# EAGLE board loc_board1_r (EAGLE 9.6.2)
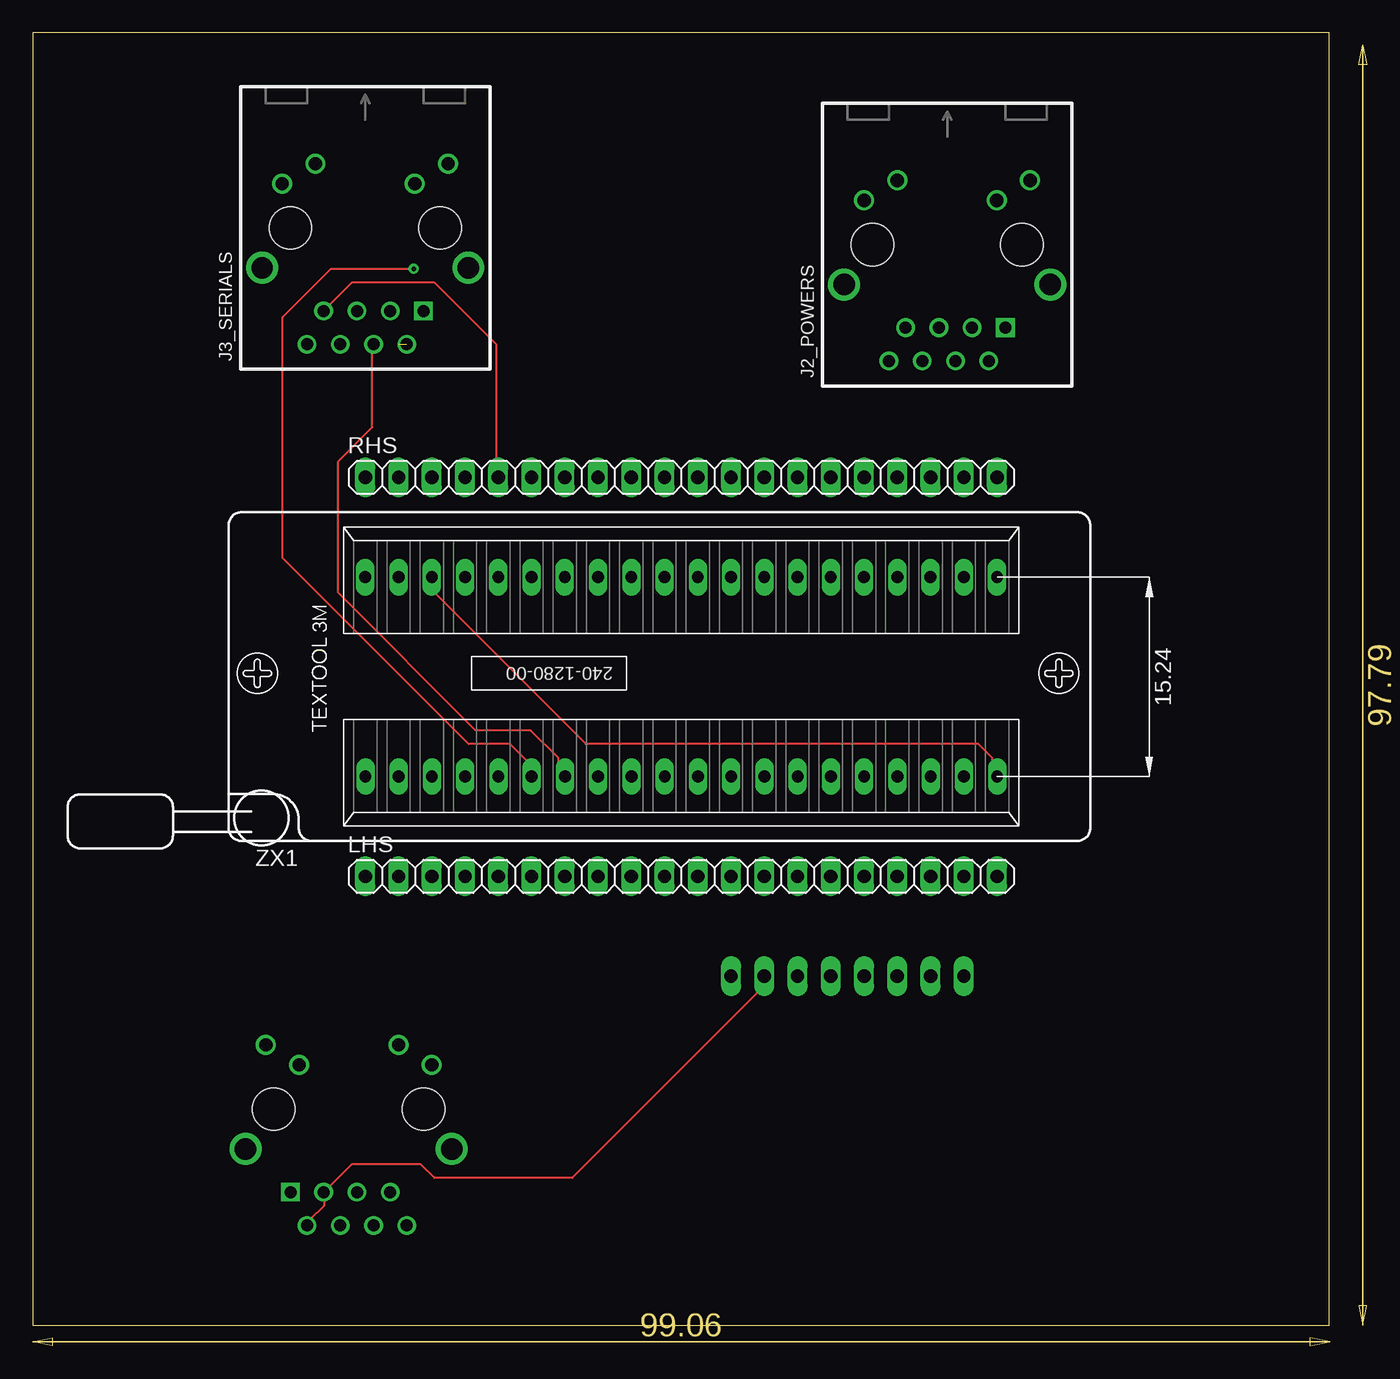
[diagram p0: board, top side]
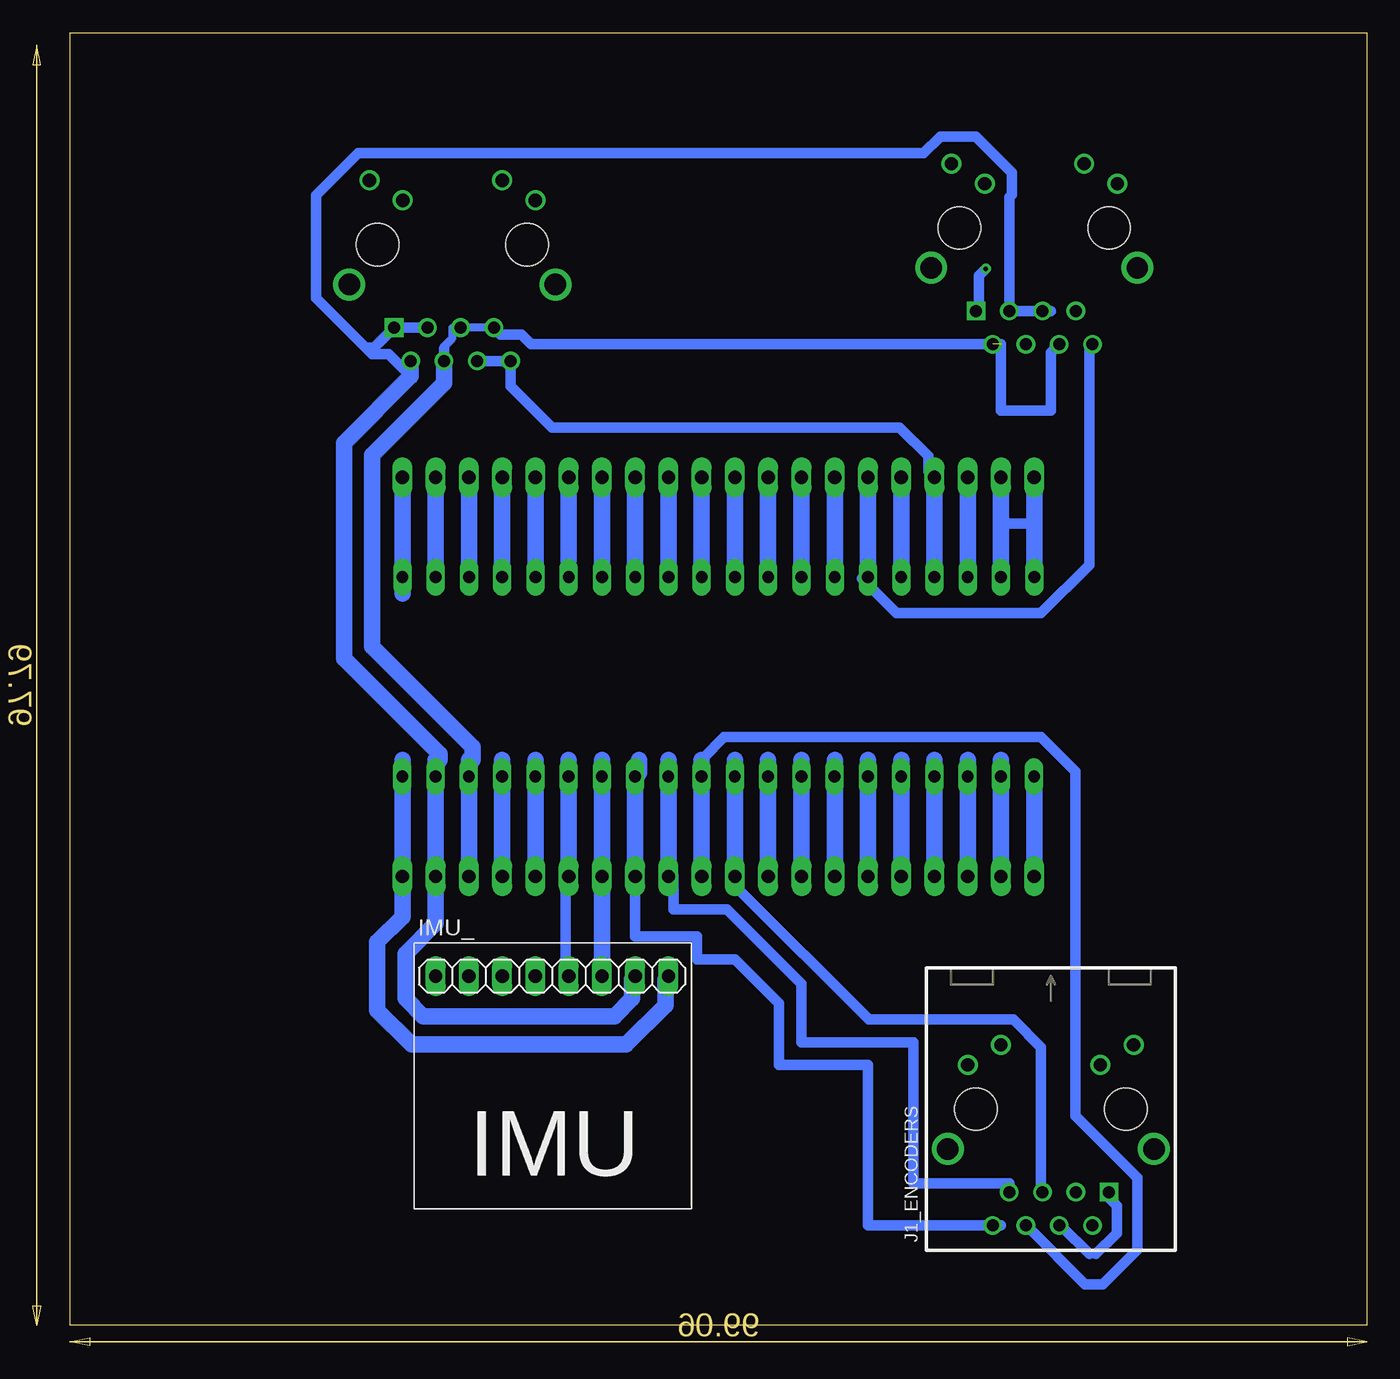
[diagram p1: board, bottom side, seen from below]

Size 99.04 x 98.73 mm. Coordinates in mm from the lower left corner, seen from the top.
Outline: 0,0 99.04,0 99.04,98.73 0,98.73 0,0
Copper layers (1*16): Top 0.035mm / dielectric 1.5mm / Bottom 0.035mm
Design rules "default *": minimum track width 6mil, minimum drill 0.35mm, track to track 0.9mm, track to pad 0.9mm, pad to pad 6mil, via to via 6mil, smd to smd 6mil, copper to edge 40mil, drill to drill 6mil, minimum pad ring 10mil, minimum via ring 8mil, stop-mask expansion 4mil, vias tented up to drill 0mil, thermal gap 10mil

## Footprints (pad centres in the part's own frame; a part is rotated, then mirrored left to right if it is on the bottom)
IMU_GY521 = drill 1.016 long: ADO -6.35,0; GND 6.35,0; INT -8.89,0; SCL 3.81,0; SDA 1.27,0; VCC 8.89,0; XCL -3.81,0; XDA -1.27,0
J0-A/B/F = drill 0.914 square: 1 4.445,-6.35 | drill 0.914: 2 3.175,-8.89; 3 1.905,-6.35; 4 0.635,-8.89; 5 -0.635,-6.35; 6 -1.905,-8.89; 7 -3.175,-6.35; 8 -4.445,-8.89 | drill 1.016: 9 6.325,4.902; 10 3.785,3.378; 11 -3.81,4.902; 12 -6.35,3.378 | drill 1.626: S1 -7.874,-3.048; S2 7.874,-3.048 | hole 3.251: -5.715,0; 5.715,0
1X20 = drill 1.016 long: 1 -24.13,0; 2 -21.59,0; 3 -19.05,0; 4 -16.51,0; 5 -13.97,0; 6 -11.43,0; 7 -8.89,0; 8 -6.35,0; 9 -3.81,0; 10 -1.27,0; 11 1.27,0; 12 3.81,0; 13 6.35,0; 14 8.89,0; 15 11.43,0; 16 13.97,0; 17 16.51,0; 18 19.05,0; 19 21.59,0; 20 24.13,0
240-1280-00-0602J = drill 0.9 long: 1 -24.12,-8.88; 2 -21.58,-8.88; 3 -19.04,-8.88; 4 -16.5,-8.88; 5 -13.96,-8.88; 6 -11.42,-8.88; 7 -8.88,-8.88; 8 -6.34,-8.88; 9 -3.8,-8.88; 10 -1.26,-8.88; 11 1.28,-8.88; 12 3.82,-8.88; 13 6.36,-8.88; 14 8.9,-8.88; 15 11.44,-8.88; 16 13.98,-8.88; 17 16.52,-8.88; 18 19.06,-8.88; 19 21.6,-8.88; 20 24.14,-8.88; 21 24.13,6.35; 22 21.59,6.35; 23 19.05,6.35; 24 16.51,6.35; 25 13.97,6.35; 26 11.43,6.35; 27 8.89,6.35; 28 6.35,6.35; 29 3.81,6.35; 30 1.27,6.35; 31 -1.27,6.35; 32 -3.81,6.35; 33 -6.35,6.35; 34 -8.89,6.35; 35 -11.43,6.35; 36 -13.97,6.35; 37 -16.51,6.35; 38 -19.05,6.35; 39 -21.59,6.35; 40 -24.13,6.35

## Placement (x,y rotation side)
IMU_  IMU_ROBOCON_GY521  [IMU_GY521]  62.23,26.67 0 bottom
J1_ENCODERS  RJ45_METAL_LEDS  [J0-A/B/F]  24.13,16.51 0 bottom
J2_POWERS  RJ45_METAL_LEDS  [J0-A/B/F]  69.85,82.55 0 top
J3_SERIALS  RJ45_METAL_LEDS  [J0-A/B/F]  25.4,83.82 0 top
LHS  [1X20]  49.53,34.29 0 top
RHS  [1X20]  49.53,64.77 0 top
ZX1  ZIF_401280  [240-1280-00-0602J]  49.53,50.8 0 top

## Library data of the parts
IMU_ J1_ENCODERS J2_POWERS J3_SERIALS LHS RHS ZX1 = MIA_LIBRARY-2-2-2

## Nets
3.3V: IMU_.VCC LHS.20 RHS.3 ZX1.20 ZX1.38
5V: J2_POWERS.4 J2_POWERS.5 J2_POWERS.7 J3_SERIALS.2 J3_SERIALS.6 LHS.18 ZX1.18
ADO: IMU_.ADO
GND: IMU_.GND J1_ENCODERS.2 J1_ENCODERS.3 J2_POWERS.1 J2_POWERS.2 J2_POWERS.3 J3_SERIALS.3 LHS.19 ZX1.19
INT: IMU_.INT
LA1: J1_ENCODERS.9
LA2: J3_SERIALS.9
LA3: J2_POWERS.9
LC1: J1_ENCODERS.10
LC2: J3_SERIALS.10
LC3: J2_POWERS.10
N$2: J1_ENCODERS.1 J1_ENCODERS.4
N$3: RHS.1 RHS.2 ZX1.39 ZX1.40
PA0: RHS.16 ZX1.25
PA1: RHS.15 ZX1.26
PA2: RHS.14 ZX1.27
PA3: RHS.13 ZX1.28
PA4: RHS.12 ZX1.29
PA5: RHS.11 ZX1.30
PA6: RHS.10 ZX1.31
PA7: RHS.9 ZX1.32
PA8: LHS.5 ZX1.5
PA9: J3_SERIALS.1 LHS.6 ZX1.6
PA10: J3_SERIALS.4 LHS.7 ZX1.7
PA11: LHS.8 ZX1.8
PA12: LHS.9 ZX1.9
PA15: J1_ENCODERS.5 LHS.10 ZX1.10
PB0: RHS.8 ZX1.33
PB1: RHS.7 ZX1.34
PB3: J1_ENCODERS.6 LHS.11 ZX1.11
PB4: J1_ENCODERS.7 LHS.12 ZX1.12
PB5: LHS.13 ZX1.13
PB6: IMU_.SCL LHS.14 ZX1.14
PB7: IMU_.SDA LHS.15 ZX1.15
PB8: LHS.16 ZX1.16
PB9: LHS.17 ZX1.17
PB10: J3_SERIALS.8 RHS.6 ZX1.35
PB11: J3_SERIALS.7 RHS.5 ZX1.36
PB12: LHS.1 ZX1.1
PB13: LHS.2 ZX1.2
PB14: LHS.3 ZX1.3
PB15: LHS.4 ZX1.4
PC13: RHS.19 ZX1.22
PC14: RHS.18 ZX1.23
PC15: RHS.17 ZX1.24
RA1: J1_ENCODERS.12
RA2: J3_SERIALS.12
RA3: J2_POWERS.12
RC1: J1_ENCODERS.11
RC2: J3_SERIALS.11
RC3: J2_POWERS.11
RESET: J2_POWERS.6 J2_POWERS.8 RHS.4 ZX1.37
S11: J1_ENCODERS.S1
S12: J3_SERIALS.S1
S13: J2_POWERS.S1
S21: J1_ENCODERS.S2
S22: J3_SERIALS.S2
S23: J2_POWERS.S2
VBAT: RHS.20 ZX1.21
XCL: IMU_.XCL
XDA: IMU_.XDA

## Tracks (layer width: path | path; a pad name or v marks a point on that pad's centre or on a via)
3.3V
  Top 0.152: ZX1.38 30.68,57.02 30.68,55.97 42.25,44.4 72.25,44.4 73.3,43.34 73.3,42.29 ZX1.20
  Bottom 0.152: ZX1.20 73.83,41.76 73.66,41.76
  Bottom 1.27: RHS.3 ZX1.38 | 73.66,43.18 73.66,41.76 LHS.20 73.66,31.21 75.59,29.28 75.59,24.06 72.97,21.44 56.57,21.44 53.58,24.43 53.58,26.43 IMU_.VCC
5V  (1 unrouted)
  Bottom 0.152: 68.58,41.76 68.56,41.76 ZX1.18 68.56,42.82 68.29,43.18 | 69.84,75.97 69.62,75.97 J2_POWERS.5 | 28.57,74.91 J3_SERIALS.2 | 23.84,74.39 23.84,74.91 J3_SERIALS.6
  Bottom 0.61: J2_POWERS.7 J2_POWERS.5 | 70.48,74.62 70.48,74.76 69.84,75.41 69.84,75.97 69.84,76.2
  Bottom 0.813: J2_POWERS.4 70.48,74.62 | J3_SERIALS.2 63.82,74.93 64.57,75.68 66.15,75.68 J2_POWERS.7 | J3_SERIALS.6 24.13,74.3 24.13,69.85 27.94,69.85 27.94,74.93
  Bottom 1.27: LHS.18 68.58,41.76 68.58,43.18 | J2_POWERS.4 70.48,71.95 75.96,66.48 75.96,51.83 68.29,44.16 68.29,43.18
GND
  Top 0.152: J1_ENCODERS.2 21.21,8.09 22.26,9.14 22.26,9.67 J1_ENCODERS.3 22.26,10.19 24.36,12.3 29.63,12.3 30.68,11.24 41.2,11.24 55.41,25.45 55.41,26.5 IMU_.GND
  Bottom 0.152: 71.12,41.76 71.19,41.76 ZX1.19 71.19,42.82 70.83,43.18
  Bottom 0.813: 73.03,72.48 74.72,74.18 75.98,74.18 76.46,74.67 | 76.46,74.67 80.25,78.46 80.25,86.3 77.03,89.52 33.85,89.52 32.58,90.79 29.85,90.79 27.12,88.06 27.12,86.34 27.31,86.15 J3_SERIALS.3 24.13,77.47 | J2_POWERS.3 J2_POWERS.1 75.83,74.67 76.46,74.67
  Bottom 1.27: 71.12,43.18 71.12,41.76 LHS.19 71.12,30.68 73.42,28.38 73.42,24.96 72.07,23.61 57.47,23.61 56.12,24.96 56.12,26.43 IMU_.GND | J2_POWERS.2 73.03,72.48 78.13,67.38 78.13,50.93 70.83,43.63 70.83,43.18
N$2
  Bottom 0.152: 20.68,5.46 21.21,5.46 | 23.31,7.56 J1_ENCODERS.4
  Bottom 0.813: J1_ENCODERS.1 19.63,9.67 19.1,9.14 19.1,7.03 20.68,5.46 | 21.21,5.46 23.31,7.56
N$3
  Bottom 0.813: 27.94,61.23 25.4,61.23
  Bottom 1.27: RHS.2 27.94,61.23 ZX1.39 | RHS.1 25.4,61.23 ZX1.40
PA0
  Bottom 1.27: RHS.16 ZX1.25
PA1
  Bottom 0.152: ZX1.26 61.2,57.55 61.2,58.08 60.96,58.42
  Bottom 1.27: RHS.15 60.96,58.42
PA2
  Bottom 1.27: RHS.14 ZX1.27
PA3
  Bottom 1.27: RHS.13 ZX1.28
PA4
  Bottom 1.27: RHS.12 ZX1.29
PA5
  Bottom 1.27: RHS.11 ZX1.30
PA6
  Bottom 1.27: RHS.10 ZX1.31
PA7
  Bottom 1.27: RHS.9 ZX1.32
PA8
  Bottom 0.152: ZX1.5 35.41,41.76 35.56,41.76
  Bottom 1.27: LHS.5 35.56,41.76 35.56,43.18
PA9  (via drill 0.35)
  Top 0.152: v29.1,80.7 22.79,80.7 19.1,77.02 19.1,58.6 33.31,44.4 36.47,44.4 38.57,42.29 ZX1.6
  Bottom 0.152: ZX1.6 38.05,41.76 38.1,41.76 | 29.63,77.55 J3_SERIALS.1
  Bottom 0.813: 29.63,77.55 29.63,80.18 v29.1,80.7
  Bottom 1.27: LHS.6 38.1,41.76 38.1,43.18
PA10
  Top 0.152: J3_SERIALS.4 25.94,74.91 25.94,68.6 23.31,65.97 23.31,55.97 33.84,45.45 38.05,45.45 40.15,43.34 40.15,42.29 ZX1.7
  Bottom 0.152: ZX1.7 40.68,41.76 40.64,41.76
  Bottom 1.27: LHS.7 40.64,41.76 40.64,43.18
PA11
  Bottom 0.152: ZX1.8 43.31,41.76 43.18,41.76
  Bottom 1.27: LHS.8 43.18,41.76 43.18,43.18
PA12
  Bottom 0.152: ZX1.9 45.94,41.76 45.72,41.76
  Bottom 1.27: LHS.9 45.72,41.76 45.72,43.18
PA15
  Bottom 0.152: ZX1.10 48.57,41.76 48.26,41.76 | 48.04,33.34 48.04,33.87 LHS.10 | 24.89,10.19 J1_ENCODERS.5
  Bottom 0.813: 48.04,33.34 38.05,23.35 26.99,23.35 24.89,21.24 24.89,10.19
  Bottom 1.27: LHS.10 48.26,41.76 48.26,43.18
PB0
  Bottom 1.27: RHS.8 ZX1.33
PB1
  Bottom 1.27: RHS.7 ZX1.34
PB3
  Bottom 0.152: ZX1.11 50.67,41.76 50.8,41.76 | 50.67,43.34 50.8,43.18 | 25.94,7.56 J1_ENCODERS.6
  Bottom 0.813: 50.67,43.34 49.09,44.92 24.89,44.92 22.26,42.29 22.26,15.98 17.52,11.24 17.52,5.76 20.15,3.13 21.52,3.13 25.94,7.56
  Bottom 1.27: LHS.11 50.8,41.76 50.8,43.18
PB4
  Bottom 0.813: J1_ENCODERS.7 27.31,10.84 34.63,10.84 34.63,21.59 43.18,21.59 43.18,26.06 48.87,31.75 52.97,31.75 52.97,34.29 LHS.12
  Bottom 1.27: LHS.12 53.34,43.18 53.35,43.17 ZX1.12
PB5
  Bottom 0.152: ZX1.13 55.94,41.76 55.59,42.2 | 55.41,33.87 LHS.13
  Bottom 0.813: LHS.13 55.88,29.7 51.17,29.7 51.17,27.94 48.26,27.94 44.89,24.57 44.89,19.88 38.1,19.88 38.1,7.62 27.94,7.62
  Bottom 1.27: LHS.13 ZX1.13 55.59,42.2 55.59,43.18
PB6
  Bottom 0.152: ZX1.14 58.57,41.76 58.42,41.76
  Bottom 1.27: 58.42,43.18 58.42,41.76 LHS.14 IMU_.SCL
PB7
  Bottom 0.152: ZX1.15 61.2,41.76 60.96,41.76 | 61.2,33.87 LHS.15 | 61.2,27.03 IMU_.SDA
  Bottom 0.813: 61.2,27.03 61.2,33.87
  Bottom 1.27: LHS.15 60.96,41.76 60.96,43.18
PB8
  Bottom 0.152: ZX1.16 63.83,41.76 63.5,41.76
  Bottom 1.27: LHS.16 63.5,41.76 63.5,43.18
PB9
  Bottom 0.152: ZX1.17 65.93,41.76 66.04,41.76
  Bottom 1.27: LHS.17 66.04,41.76 66.04,43.18
PB10
  Bottom 0.152: 21.21,74.91 J3_SERIALS.8 | 38.57,57.02 ZX1.35
  Bottom 0.813: 21.21,74.91 21.21,58.08 24.89,54.39 35.94,54.39 38.57,57.02
  Bottom 1.27: RHS.6 ZX1.35
PB11
  Top 0.152: J3_SERIALS.7 22.26,77.55 24.36,79.65 30.68,79.65 35.41,74.91 35.41,64.92 RHS.5
  Bottom 1.27: RHS.5 ZX1.36
PB12
  Bottom 1.27: LHS.1 ZX1.1
PB13
  Bottom 0.152: ZX1.2 28.05,41.76 27.94,41.76
  Bottom 1.27: LHS.2 27.94,41.76 27.94,43.18
PB14
  Bottom 0.152: ZX1.3 30.68,41.76 30.48,41.76
  Bottom 1.27: LHS.3 30.48,41.76 30.48,43.18
PB15
  Bottom 0.152: ZX1.4 33.31,41.76 33.02,41.76
  Bottom 1.27: LHS.4 33.02,41.76 33.02,43.18
PC13
  Bottom 1.27: RHS.19 ZX1.22
PC14
  Bottom 1.27: RHS.18 ZX1.23
PC15
  Bottom 1.27: RHS.17 ZX1.24
RESET
  Bottom 0.813: J2_POWERS.6 J2_POWERS.8 65.41,71.75 62.23,68.58 35.68,68.58 33.49,66.39 33.49,65.24 RHS.4
  Bottom 1.27: RHS.4 ZX1.37
VBAT
  Bottom 0.152: ZX1.21 73.83,57.02 73.66,57.02
  Bottom 1.27: RHS.20 ZX1.21 73.66,57.02 73.66,55.88